# EAGLE board dual_motor_driver_v6 (EAGLE 8.2.2)
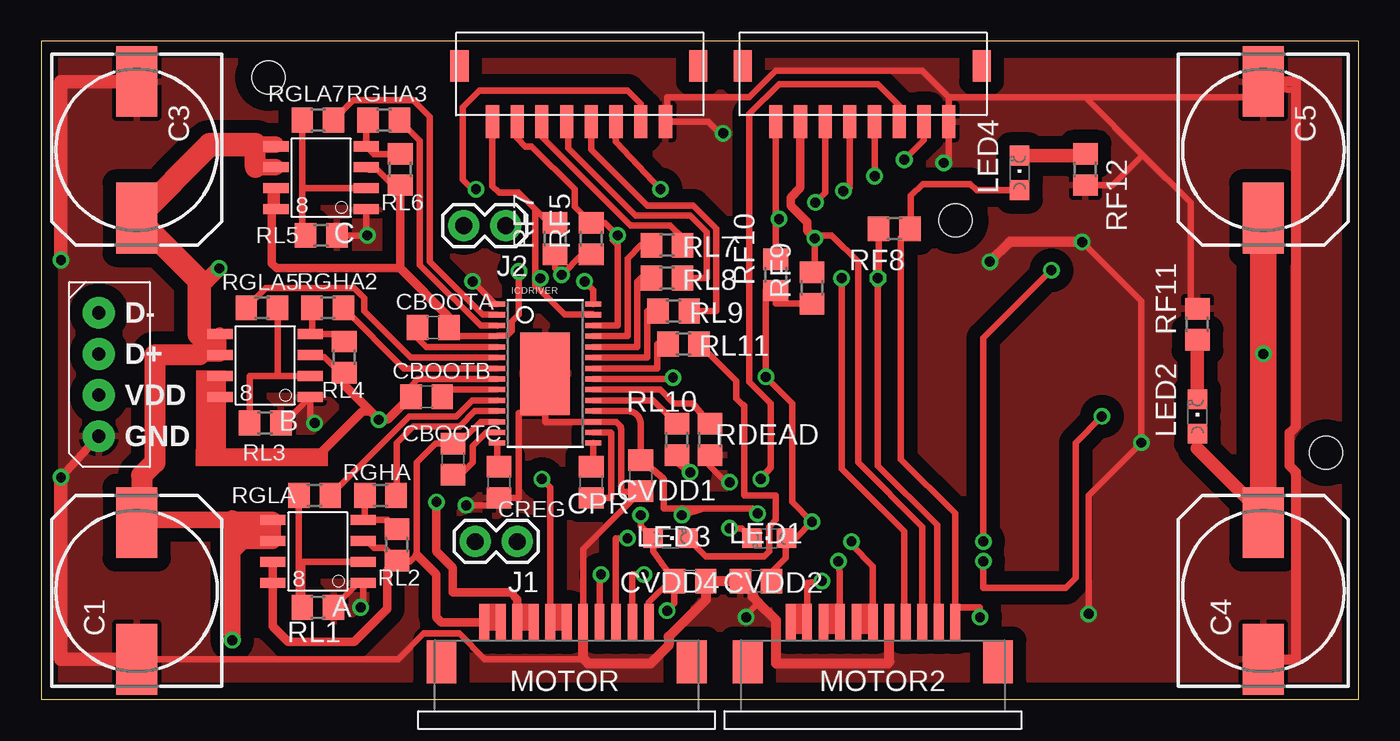
[diagram p0: board, top side]
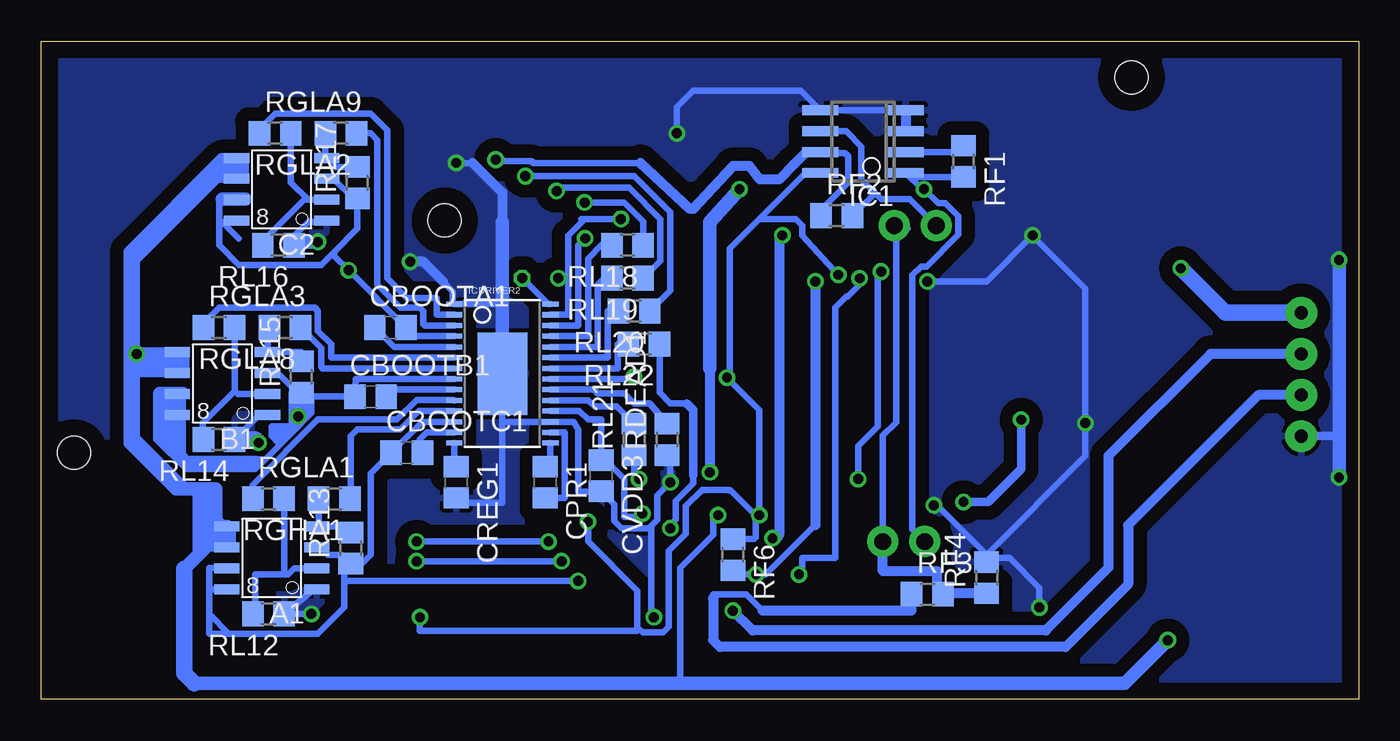
[diagram p1: board, bottom side, seen from below]

Size 80 x 40 mm. Coordinates in mm from the lower left corner, seen from the top.
Outline: 0,0 80,0 80,40 0,40 0,0
Copper layers (1*16): Top 0.035mm / dielectric 1.5mm / Bottom 0.035mm
Design rules "Dedo_v5": minimum track width 10mil, minimum drill 24mil, track to track 0.205mm, track to pad 0.205mm, pad to pad 0.205mm, via to via 0.205mm, smd to smd 8mil, copper to edge 40mil, drill to drill 8mil, minimum pad ring 10mil, minimum via ring 8mil, stop-mask expansion 4mil, vias tented up to drill 0mil, thermal gap 10mil
Net classes: 0 default: clearance 0.205 mm
Holes 2 mm at 13.8,37.8 78,15 55.5,29.1

## Footprints (pad centres in the part's own frame; a part is rotated, then mirrored left to right if it is on the bottom)
SOIC8 = smd 1.524 x 0.61: 1 -2.743,1.905; 2 -2.743,0.635; 3 -2.743,-0.635; 4 -2.743,-1.905; 5 2.743,-1.905; 6 2.743,-0.635; 7 2.743,0.635; 8 2.743,1.905
140CLH-1010 = smd 4.3 x 2.5: + 4.15,0; - -4.15,0
C0805 = smd 1.3 x 1.5: 1 -0.95,0; 2 0.95,0
SO08 = smd 0.6 x 2.2: 1 -1.905,-2.6; 2 -0.635,-2.6; 3 0.635,-2.6; 4 1.905,-2.6; 5 1.905,2.6; 6 0.635,2.6; 7 -0.635,2.6; 8 -1.905,2.6
TSSOP28 = smd 0.305 x 0.991: 1 -4.225,-2.918; 2 -3.575,-2.918; 3 -2.925,-2.918; 4 -2.275,-2.918; 5 -1.625,-2.918; 6 -0.975,-2.918; 7 -0.325,-2.918; 8 0.325,-2.918; 9 0.975,-2.918; 10 1.625,-2.918; 11 2.275,-2.918; 12 2.925,-2.918; 13 3.575,-2.918; 14 4.225,-2.918; 15 4.225,2.918; 16 3.575,2.918; 17 2.925,2.918; 18 2.275,2.918; 19 1.625,2.918; 20 0.975,2.918; 21 0.325,2.918; 22 -0.325,2.918; 23 -0.975,2.918; 24 -1.625,2.918; 25 -2.275,2.918; 26 -2.925,2.918; 27 -3.575,2.918; 28 -4.225,2.918 | smd 5 x 3: PAD 0,0
1X02 = drill 1.016 pad 1.88: 1 0,0; 2 2.54,0
CHIPLED_0805 = smd 1.2 x 1.2: A 0,-1.05; C 0,1.05
68611114122 = smd 0.6 x 2.2: 1 -8.5,1.1; 2 -7.5,1.1; 3 -6.5,1.1; 4 -5.5,1.1; 5 -4.5,1.1; 6 -3.5,1.1; 7 -2.5,1.1; 8 -1.5,1.1; 9 -0.5,1.1; 10 0.5,1.1; 11 1.5,1.1 | smd 1.8 x 2.6: Z1 -11.1,-1.3; Z2 4.1,-1.3
R0805 = smd 1.3 x 1.5: 1 -0.95,0; 2 0.95,0
JST = smd 0.8 x 2: 1 -4.8,-2.7; 2 -3.3,-2.7; 3 -1.8,-2.7; 4 -0.3,-2.7; 5 1.2,-2.7; 6 2.7,-2.7; 7 4.2,-2.7; 8 5.7,-2.7 | smd 1.1 x 1.9: 9 -6.8,0.7; 10 7.7,0.7
DYNAMIXEL_SPOX_04 = drill 0.8 pad 1.93: 1 0,0; 2 2.5,0; 3 5,0; 4 7.5,0

## Placement (x,y rotation side)
A  FDS8949  [SOIC8]  16.8,9 180 top
A1  FDS8949  [SOIC8]  66,8.6 180 bottom
B  FDS8949  [SOIC8]  13.6,20.3 180 top
B1  FDS8949  [SOIC8]  69,19.2 180 bottom
C  FDS8949  [SOIC8]  17,31.7 180 top
C1  470u  [140CLH-1010]  5.8,6.6 90 top
C2  FDS8949  [SOIC8]  65.4,31 180 bottom
C3  470u  [140CLH-1010]  5.8,33.4 270 top
C4  470u  [140CLH-1010]  74.2,6.6 90 top
C5  470u  [140CLH-1010]  74.2,33.4 270 top
CBOOTA  0.033u  [C0805]  23.8,22.6 0 top
CBOOTA1  0.033u  [C0805]  58.8,22.6 0 bottom
CBOOTB  0.033u  [C0805]  23.4,18.4 0 top
CBOOTB1  0.033u  [C0805]  60,18.4 0 bottom
CBOOTC  0.033u  [C0805]  25,14.6 270 top
CBOOTC1  0.033u  [C0805]  57.8,15 0 bottom
CPR  0.47u  [C0805]  33.4,13.2 270 top
CPR1  0.47u  [C0805]  49.4,13.2 270 bottom
CREG  0.68u  [C0805]  27.8,13.2 270 top
CREG1  0.68u  [C0805]  54.8,13.2 270 bottom
CVDD1  0.1U  [C0805]  36.4,13.6 270 top
CVDD2  0.1u  [C0805]  43.4,7.2 180 top
CVDD3  0.1U  [C0805]  46,13.6 270 bottom
CVDD4  0.1u  [C0805]  39.4,7.2 0 top
IC1  MCP602SN  [SO08]  30.1,33.9 90 bottom
ICDRIVER  A9415  [TSSOP28]  30.6,19.8 270 top
ICDRIVER2  A9415  [TSSOP28]  52,19.8 270 bottom
J1  [1X02]  28.9,9.6 180 top
J2  [1X02]  28.2,28.8 180 top
LED1  [CHIPLED_0805]  44.2,9.8 90 top
LED2  [CHIPLED_0805]  70.2,17.2 0 top
LED3  [CHIPLED_0805]  38.2,9.8 270 top
LED4  [CHIPLED_0805]  59.4,32 0 top
MOTOR  68611114122  [68611114122]  35.4,3.6 0 top
MOTOR2  68611114122  [68611114122]  54,3.6 0 top
RDEAD  40.2k  [R0805]  40.6,15.8 90 top
RDEAD1  40.2k  [R0805]  42,15.8 90 bottom
RF1  200k  [R0805]  24,32.7 270 bottom
RF2  200k  [R0805]  31.7,29.4 0 bottom
RF3  10k  [R0805]  26.2,6.4 0 bottom
RF4  1k  [R0805]  22.6,7.4 90 bottom
RF5  12k  [R0805]  33.4,28 90 top
RF6  12k  [R0805]  38,8.8 270 bottom
RF7  12k  [R0805]  31.2,28 90 top
RF8  12k  [R0805]  51.8,28.6 180 top
RF9  12k  [R0805]  46.8,25 90 top
RF10  12k  [R0805]  44.6,25.8 90 top
RF11  10k  [R0805]  70.2,22.8 90 top
RF12  10k  [R0805]  63.4,32.2 270 top
RGHA  47.5  [R0805]  20.6,12.4 180 top
RGHA1  47.5  [R0805]  62.2,12.2 180 bottom
RGHA2  47.5  [R0805]  17.4,23.8 180 top
RGHA3  47.5  [R0805]  20.8,35.2 180 top
RGLA  47.5  [R0805]  16.6,12.4 180 top
RGLA1  47.5  [R0805]  66.2,12.2 0 bottom
RGLA2  47.5  [R0805]  61.8,34.4 180 bottom
RGLA3  47.5  [R0805]  69.2,22.6 0 bottom
RGLA5  47.5  [R0805]  13.4,23.8 0 top
RGLA7  47.5  [R0805]  16.8,35.2 180 top
RGLA8  47.5  [R0805]  65.2,22.6 180 bottom
RGLA9  47.5  [R0805]  65.8,34.4 0 bottom
RL1  470K  [R0805]  16.8,5.6 180 top
RL2  470K  [R0805]  21.6,9.4 90 top
RL3  470K  [R0805]  13.6,16.8 180 top
RL4  470K  [R0805]  18.4,20.8 90 top
RL5  470K  [R0805]  17,28.2 180 top
RL6  470K  [R0805]  21.8,32.2 90 top
RL7  1k  [R0805]  38,27.6 180 top
RL8  1k  [R0805]  38,25.6 180 top
RL9  1k  [R0805]  38.4,23.6 180 top
RL10  1k  [R0805]  38.6,15.8 90 top
RL11  1k  [R0805]  39,21.6 180 top
RL12  470K  [R0805]  66.2,5.2 180 bottom
RL13  470K  [R0805]  61.2,9.2 90 bottom
RL14  470K  [R0805]  69.2,15.8 180 bottom
RL15  470K  [R0805]  64.2,19.6 90 bottom
RL16  470K  [R0805]  65.6,27.6 180 bottom
RL17  470K  [R0805]  60.8,31.4 90 bottom
RL18  1k  [R0805]  44.4,27.6 180 bottom
RL19  1k  [R0805]  44.4,25.6 180 bottom
RL20  1k  [R0805]  44,23.6 180 bottom
RL21  1k  [R0805]  44,15.8 90 bottom
RL22  1k  [R0805]  43.4,21.6 180 bottom
U$1  JST8  [JST]  32.2,37.8 0 top
U$2  JST8  [JST]  49.4,37.8 0 top
U$3  DYNAMIXEL_RS485  [DYNAMIXEL_SPOX_04]  3.5,16 90 top

## Library data of the parts
A A1 B B1 C C2 IC1 ICDRIVER ICDRIVER2 U$1 U$2 = dedo
C1 C3-C5 CBOOTA CBOOTA1 CBOOTB CBOOTB1 CBOOTC CBOOTC1 CPR CPR1 CREG CREG1 CVDD1-CVDD4 RDEAD RDEAD1 RF1-RF12 RGHA RGHA1-RGHA3 RGLA RGLA1-RGLA3 RGLA5 RGLA7-RGLA9 RL1-RL22 = resistor
J1 J2 U$3 = uchile_robotics_eagle_lib
LED1-LED4 = adafruit
MOTOR MOTOR2 = FPC_Connectors_Flat_Flexible_Cable_rev15c

## Nets
+5V: CVDD2.1 CVDD4.1 IC1.8 ICDRIVER2.21 ICDRIVER.21 LED1.A LED3.A LED4.A MOTOR2.11 MOTOR.11 RF5.1 RF6.1 RF7.1 RF8.1 RF9.1 RF10.1 U$3.3
+24V: A1.5 A1.6 A.5 A.6 B1.5 B1.6 B.5 B.6 C1.+ C2.5 C2.6 C3.+ C4.+ C5.+ C.5 C.6 CVDD1.1 CVDD3.1 ICDRIVER2.18 ICDRIVER.18 LED2.A U$3.4
-5V: RF3.1 U$3.2
BRAKEN: RL7.1 U$1.3
BRAKEN2: RL18.1 U$2.3
DIR: RL8.1 U$1.4
DIR2: RL19.1 U$2.4
ENABLE: RL9.1 U$1.5
ENABLE2: RL20.1 U$2.5
GND: A1.1 A.1 B1.1 B.1 C1.- C2.1 C3.- C4.- C5.- C.1 CREG1.2 CREG.2 CVDD1.2 CVDD2.2 CVDD3.2 CVDD4.2 IC1.3 IC1.4 IC1.5 ICDRIVER2.1 ICDRIVER2.17 ICDRIVER2.PAD ICDRIVER.1 ICDRIVER.17 ICDRIVER.PAD MOTOR2.7 MOTOR.7 RDEAD1.1 RDEAD.1 RF4.2 RF11.2 RF12.2 RL1.1 RL3.1 RL5.1 RL12.1 RL14.1 RL16.1 U$1.8 U$2.8 U$3.1
HA: ICDRIVER.26 MOTOR.9 RF5.2 U$1.2
HA2: ICDRIVER2.26 MOTOR2.9 RF9.2 U$2.2
HB: ICDRIVER.27 MOTOR.8 RF7.2 U$1.1
HB2: ICDRIVER2.27 MOTOR2.8 RF10.2 U$2.1
HC: ICDRIVER.28 MOTOR.10 RF6.2
HC2: ICDRIVER2.28 MOTOR2.10 RF8.2
MOTOR2_1: A1.3 A1.7 A1.8 CBOOTC1.1 ICDRIVER2.12 MOTOR2.1 MOTOR2.2 RL13.1
MOTOR2_2: B1.3 B1.7 B1.8 CBOOTB1.1 ICDRIVER2.8 MOTOR2.3 MOTOR2.4 RL15.1
MOTOR2_3: C2.3 C2.7 C2.8 CBOOTA1.2 ICDRIVER2.4 MOTOR2.5 MOTOR2.6 RL17.1
MOTOR_1: A.3 A.7 A.8 CBOOTC.1 ICDRIVER.12 MOTOR.1 MOTOR.2 RL2.1
MOTOR_2: B.3 B.7 B.8 CBOOTB.1 ICDRIVER.8 MOTOR.3 MOTOR.4 RL4.1
MOTOR_3: C.3 C.7 C.8 CBOOTA.2 ICDRIVER.4 MOTOR.5 MOTOR.6 RL6.1
N$1: A1.2 RGLA1.2 RL12.2
N$2: A1.4 RGHA1.2 RL13.2
N$3: B1.2 RGLA3.2 RL14.2
N$4: B1.4 RGLA8.2 RL15.2
N$5: C2.2 RGLA9.2 RL16.2
N$6: C2.4 RGLA2.2 RL17.2
N$7: B.2 RGLA5.2 RL3.2
N$8: B.4 RGHA2.2 RL4.2
N$9: ICDRIVER2.11 RGHA1.1
N$10: ICDRIVER2.10 RGLA1.1
N$11: ICDRIVER2.6 RGLA3.1
N$12: ICDRIVER2.7 RGLA8.1
N$13: CBOOTA1.1 ICDRIVER2.5
N$14: CBOOTB1.2 ICDRIVER2.9
N$15: C.2 RGLA7.2 RL5.2
N$16: CPR.1 ICDRIVER.15
N$17: ICDRIVER.11 RGHA.1
N$18: C.4 RGHA3.2 RL6.2
N$19: CREG1.1 ICDRIVER2.14
N$20: ICDRIVER.10 RGLA.1
N$21: CREG.1 ICDRIVER.14
N$22: CBOOTC.2 ICDRIVER.13
N$23: CBOOTC1.2 ICDRIVER2.13
N$24: ICDRIVER.2 RGLA7.1
N$25: ICDRIVER.6 RGLA5.1
N$26: ICDRIVER.7 RGHA2.1
N$27: ICDRIVER.3 RGHA3.1
N$28: CBOOTB.2 ICDRIVER.9
N$29: CPR.2 ICDRIVER.16
N$30: ICDRIVER2.2 RGLA9.1
N$31: CBOOTA.1 ICDRIVER.5
N$32: A.2 RGLA.2 RL1.2
N$33: A.4 RGHA.2 RL2.2
N$34: ICDRIVER2.3 RGLA2.1
N$35: CPR1.1 ICDRIVER2.15
N$36: CPR1.2 ICDRIVER2.16
N$37: ICDRIVER2.19 RL21.2
N$38: ICDRIVER2.23 RL20.2
N$39: ICDRIVER2.24 RL19.2
N$40: ICDRIVER.19 RL10.2
N$41: ICDRIVER.23 RL9.2
N$42: ICDRIVER.24 RL8.2
N$43: ICDRIVER2.25 RL18.2
N$44: ICDRIVER.25 RL7.2
N$45: ICDRIVER.20 RDEAD.2
N$46: ICDRIVER.22 RL11.2
N$47: LED3.C RL11.1
N$48: LED2.C RF11.1
N$49: ICDRIVER2.20 RDEAD1.2
N$50: ICDRIVER2.22 RL22.2
N$51: LED1.C RL22.1
N$59: LED4.C RF12.1
N$76: IC1.2 RF1.1
N$82: IC1.6 J2.2 RF2.2
SPEED: RL10.1 U$1.6
SPEED2: RL21.1 U$2.6
VOUT1: IC1.1 J1.2 RF1.2 U$1.7
VOUT2: IC1.7 RF2.1 U$2.7
VT: J1.1 J2.1 RF3.2 RF4.1

## Tracks (layer width: path | path; a pad name or v marks a point on that pad's centre or on a via)
+5V  (via drill 0.6)
  Top 0.406: 38.34,7.34 37.15,9 LED3.A 36.4,10.55 v36.4,11.2 | 38.34,7.34 CVDD4.1 38.45,5.85 v38,5.4 | MOTOR.11 36.9,5.9 38.34,7.34 | CVDD2.1 44.35,7.75 45.2,8.6 45.2,9.75 LED1.A 45.8,9.8 v46.8,10.8 45.6,12 45.6,18 v44,19.6 44,24.85 RF10.1 44.6,24.05 RF9.1 | ICDRIVER.21 38.27,19.48 v38.36,19.56 | v31.6,25.8 31.4,26 | v57,5 57,5.6 55.5,5.6 MOTOR2.11 55.5,11.3 52.2,14.6 52.2,28.05 RF8.1 52.8,28.65 52.8,30.6 53.52,31.32 56.42,31.32 56.79,30.95 LED4.A | RF7.1 31.2,26.2 v31.6,25.8 | RF5.1 32.85,27.05 v31.6,25.8
  Bottom 0.406: 43.8,4.4 43.8,4.17 57,4.17 v57,5 | 43.8,4.4 43.8,6.61 46.8,9.61 v46.8,10.8 | 36.6,11.19 36.41,11 36.6,11 v36.4,11.2 36.4,17.6 v38.36,19.56 38.2,19.72 38.2,27.4 36.4,29.2 | 36.6,11.19 38.12,12.71 38.26,12.71 38.27,12.72 39.88,12.72 39.89,12.71 | ICDRIVER2.21 44.12,19.48 v44,19.6 | 43.8,4.4 43.49,4.09 42.22,4.09 41.89,4.42 41.89,9.02 40.85,10.06 40.85,11.75 39.89,12.71 | 39.89,12.71 39.8,12.71 | IC1.8 33.6,32 36.4,29.2 | 36.4,29.2 34.2,29.2 33.8,28.8 33.8,28.2 v31.6,25.8 | 36.6,11.19 36.6,9.85 36.7,9.75 RF6.1
  Bottom 0.61: U$3.3 9,21 15.2,14.8 15.2,8 19,4.2 36.8,4.2 v38,5.4
+24V  (via drill 0.6)
  Top 0.406: 14.26,33.7 C.5 | 13,9.63 A.6 | 14.06,11 A.5 | C1.+ 6.05,11 6.34,11 11.6,11 14.06,11 | C5.+ v74.2,21 74.2,11.67 | 74.2,11.67 C4.+ | 40.2,11.6 37.8,11.6 37.8,13.4 37.35,13.8 CVDD1.1 36.4,16.75 arc90 35.62,17.52 ICDRIVER.18 | 40.2,11.6 v38.9,11.2 | 40.2,11.6 43.2,11.6 v43.5,11.3 | 14.06,11 | 14.06,11 11.6,8.54 | 73.46,11.98 73.89,11.98 74.2,11.67 | LED2.A 70.2,15.25
  Top 0.813: 9.6,22.2 9.6,20.93 B.6 B.5 | 6.1,10.75 C1.+ | 70.2,15.25 73.46,11.98
  Top 1.016: C.6 13,32.34 | 13,33.7 14.26,33.7 | 9.6,25.45 10.05,25.45 v10.8,26.2 | 11.6,9.58 11.6,8.54 v11.6,3.6 | 11.6,10.27 11.6,9.58 | 11.6,10.27 11.6,11 | 14.06,10.4 A.5 6.43,10.9 6.34,11 | 14.06,10.4 A.6 11.66,9.63 11.6,9.58 | 14.06,10.4 11.73,10.4 11.6,10.27
  Top 1.27: 13,32.34 13,33.7 | 6.1,10.75 6.1,13.6 6.9,14.4 6.9,20.93 9.6,20.93
  Top 1.422: 13,33.7 10.25,33.7 C3.+ 9.6,25.45 9.6,22.2
  Bottom 0.406: B1.6 72.8,19.84 72.8,21 | 72.8,21 71.74,21 B1.5 | C2.6 69.2,31.64 | 69.2,31.64 69.2,32.8 68.14,32.8 C2.5 | 72.8,21 v74.2,21 | v74.2,21 74.2,15.96 A1.5 69.8,10.51 69.8,9.2 68.74,9.2 A1.6 | 69.2,31.64 74.2,26.64 v74.2,21 | ICDRIVER2.18 47.33,17.52 46.8,17 46,17 CVDD3.1 45.55,14.35 44.6,13.4 44.6,11.1 43.7,11.1 v43.5,11.3 | 39,1 38.97,1 | 41.2,1 41.2,8 39.2,10 39.2,10.9 v38.9,11.2
  Bottom 0.813: A1.5 71.3,7.95 | 70.7,1 41.2,1 39,1 | 38.97,1 14.2,1 v11.6,3.6
  Bottom 1.016: 71.3,7.95 71.3,1.6 70.7,1 | U$3.4 8.1,23.5 v10.8,26.2
-5V
  Bottom 0.406: 36.2,5.4 37.2,6.4 39.2,6.4 39.2,6.17
  Bottom 0.61: U$3.2 6.1,18.5 14,10.6 14,7 17.8,3.2 38.8,3.2 39.2,3.6 39.2,6.17 | 36.2,5.4 27.15,5.4 RF3.1
BRAKEN
  Top 0.406: RL7.1 38.95,28.05 38.2,28.8 35.8,28.8 30.4,34.2 U$1.3
BRAKEN2  (via drill 0.6)
  Top 0.406: v47,30.2 47.6,30.8 U$2.3
  Bottom 0.406: RL18.1 43.45,29.05 44.6,30.2 v47,30.2
DIR
  Top 0.406: RL8.1 40.4,25.6 40.4,28.4 39.4,29.4 36.1,29.4 32,33.5 32,35 U$1.4
DIR2  (via drill 0.6)
  Top 0.406: 49.1,31.1 v48.7,30.9 49.1,31.3 U$2.4
  Bottom 0.406: RL19.1 42.4,26.65 42.4,29.2 44.3,31.1 48.5,31.1 v48.7,30.9
ENABLE
  Top 0.406: RL9.1 41,23.6 41,28.6 39.6,30 36.8,30 33.4,33.4 U$1.5
ENABLE2  (via drill 0.6)
  Top 0.406: v50.6,31.8 U$2.5
  Bottom 0.406: RL20.1 41.8,24.85 41.8,29.6 44,31.8 v50.6,31.8
GND  (via drill 0.6)
  Top 0.406: 55.1,36.6 U$2.8 55.1,32.9 v54.8,32.6 | 63.38,36.6 55.1,36.6 | 63.38,36.6 73.25,36.6 C5.- 74.2,37.2 76.2,37 | 55.1,36.6 53.5,38.2 44.6,38.2 43,36.6 38,36.6 38,35.1 U$1.8 40.5,35.1 41.2,34.4 v41.4,34.4 | 30.6,17.4 ICDRIVER.PAD | 30.6,17.4 30.6,16.88 ICDRIVER.17 34.92,16.88 35.2,16.6 35.2,16.46 35.21,16.45 35.21,12.6 36.4,12.6 CVDD1.2 32.9,9.15 MOTOR.7 | 30.6,17.4 29,17.4 29,12.25 CREG.2 27.35,11.8 v25.8,11.8 | RDEAD.1 40.6,14.2 41.6,13.2 v41.8,13.2 | v42.8,5 42.8,5.13 43.55,5.88 | 33.2,2.2 32.95,2.45 26.93,2.45 25.37,4.01 23.23,4.01 21.67,2.45 C1.- | RL3.1 14.75,16.8 B.1 16.34,17.06 v16.6,16.8 | 66.89,33.09 69.8,30.18 69.8,24.15 RF11.2 | 66.89,33.09 63.38,36.6 | RF12.2 65.06,31.25 66.89,33.09 | v63.2,27.8 66.8,24.2 v66.8,15.6 63.6,12.4 v63.6,5.2 | RL1.1 19.25,7.09 A.1 19.54,5.74 v19.4,5.6 | ICDRIVER.1 27.57,24.02 v26.2,25.4 | C.1 19.74,28.26 v19.8,28.2 RL5.1
  Top 0.508: v1.2,13.5 U$3.1
  Top 0.61: C4.- 76.2,2.45 76.2,13.8 75.8,14.2 75.8,16.2 76.2,16.6 76.2,37.55 C5.- | MOTOR.7 32.9,2.5 33.2,2.2 37,2.2 38.09,3.29 38.09,3.81 40.35,6.07 CVDD4.2 CVDD2.2 43.19,6.46 43.19,6.24 43.55,5.88 44.6,4.83 44.6,2.2 51.4,2.2 51.5,2.3 MOTOR2.7 | v63.2,27.8 58.8,27.8 v57.6,26.6
  Top 0.813: v1.2,26.7 1.2,37.55 C3.- | v1.2,13.5 1.2,2.45 C1.-
  Bottom 0.152: 25.4,12 25.6,11.8
  Bottom 0.406: 52,16.88 52,11.95 54.5,11.95 CREG1.2 | 52,16.88 ICDRIVER2.PAD | 52,16.88 ICDRIVER2.17 47.67,16.88 47.4,16.4 47.4,12.6 46.25,12.6 CVDD3.2 45.21,11.86 45.21,10.85 44.75,10.39 43.12,10.39 42.96,10.56 | 53.8,32.6 v54.8,32.6 | RDEAD1.1 41.8,14.65 v41.8,13.2 42.59,12.41 42.59,10.92 42.96,10.56 | 42.96,10.56 42.96,5.16 v42.8,5 | v41.4,34.4 41.4,36 40.4,37 33.9,37 IC1.5 IC1.4 | 22.6,8.8 RF4.2 22.35,8.6 21.2,8.6 19.4,6.8 v19.4,5.6 | 22.6,8.8 25.6,11.8 v25.8,11.8 | A1.1 63.45,6.7 RL12.1 v63.6,5.2 | B1.1 66.75,17.3 RL14.1 | C2.1 62.75,29 63.8,29 64.65,28.15 RL16.1 64.45,27.8 | v66.8,15.6 67,15.8 | 55.6,25.4 55,24.8 55,24.11 ICDRIVER2.1 52.14,24.02 52,23.89 | v26.2,25.4 22.6,25.4 19.82,28.18 | 19.82,28.18 v19.8,28.2 | 22.6,8.8 16.6,14.8 v16.6,16.8 16.6,24.96 19.82,28.18
  Bottom 0.508: 1.22,16 U$3.1
  Bottom 0.61: 53.8,32.6 52,30.8 52,29 | IC1.4 IC1.3 | 55.6,25.4 56.8,26.6 v57.6,26.6
  Bottom 0.813: 52,29 52,23.89 ICDRIVER2.PAD | v1.2,26.7 v1.2,13.5 | 64.45,27.8 v63.2,27.8
  Bottom 1.016: 67,15.8 RL14.1
  pour Top (isolate 0.813): 0,0 80,0 80,40 0,40
  pour Bottom (isolate 0.813): 0,0 80,0 80,40 0,40
HA  (via drill 0.6)
  Top 0.406: ICDRIVER.26 35,22.73 35,27.6 34.7,27.9 v35,28.2 34.25,28.95 RF5.2 32.4,29.95 32.4,31 29.8,33.6 29.4,33.6 28.9,34.1 U$1.2 28.8,35 | MOTOR.9 34.9,9.8 v35.6,9.8
  Bottom 0.406: 35.2,10 35.2,9.8 v35.6,9.8
  Bottom 0.61: 35.2,10 35.2,28.2 v35,28.2
HA2  (via drill 0.6)
  Top 0.406: MOTOR2.9 53.5,10.5 49.6,14.4 49.6,26.6 48,28.2 47.15,28.2 v46.98,28.02 46.98,26.13 RF9.2
  Top 0.508: U$2.2 46.1,31.1 45.5,30.5 45.5,30 46.5,29 46.5,28.5 v46.98,28.02 47,28
  Bottom 0.406: ICDRIVER2.26 47.4,22.73 47.4,27.6 v46.98,28.02 46.8,28.2
HB  (via drill 0.6)
  Top 0.406: ICDRIVER.27 33.48,23.41 32.9,23.41 32.89,23.4 31.8,23.4 30.01,25.19 | MOTOR.8 33.9,7.51 v33.99,7.6 | U$1.1 27.4,31.2 27.8,30.8 29,30.8 30.01,29.79 | RF7.2 30.85,28.95 30.01,29.79 | 30.01,25.19 30.01,29.79 | v30.31,25.59 30.01,25.19
  Bottom 0.406: v34,7.6 v33.99,7.6 33.8,7.6 33.8,8.6 31.8,8.6 31.8,23.8 31.11,24.49 31.02,24.49 30.32,25.19 v30.31,25.59
HB2  (via drill 0.6)
  Top 0.406: 44.6,29.4 U$2.1 | 44.6,29.4 v44.8,29.2 | v48.6,25.6 48.6,14 52.4,10.2 52.4,4.8 MOTOR2.8 | RF10.2 44.6,29.4
  Bottom 0.406: ICDRIVER2.27 48,23.38 48,25.6 | 48,25.6 48,28.2 47,29.2 | 47,29.2 v44.8,29.2 | v48.6,25.6 48,25.6 | 47.2,29.2 47,29.2
HC  (via drill 0.6)
  Top 0.406: v33,25.4 33.52,24.88 ICDRIVER.28 | MOTOR.10 35.9,7.6 v36.6,7.6
  Bottom 0.406: 33,10.6 36,7.6 v36.6,7.6 37.75,7.6 RF6.2
  Bottom 0.61: v33,25.4 33,10.6
HC2  (via drill 0.6)
  Top 0.406: MOTOR2.10 54.4,4.8 54.4,10.6 50.8,14.2 v50.8,25.6 50.85,25.65 RF8.2
  Bottom 0.406: ICDRIVER2.28 49.23,24.02 v50.8,25.6
MOTOR2_1  (via drill 0.6)
  Top 0.406: MOTOR2.2 46.5,7.1 v47.4,7.2
  Top 0.508: MOTOR2.1 MOTOR2.2
  Bottom 0.406: RL13.1 61.75,8.8 62.6,8.8 63.03,9.23 A1.3 | A1.8 69.8,6.7 | 69.8,6.7 69.8,8 68.74,8 A1.7 | ICDRIVER2.12 56.88,16.88 CBOOTC1.1 60,13.75 60,8.8 60.55,8.25 RL13.1 | 69.8,6.7 69.8,5.2 | 69.8,5.2 68.6,4 | 68.6,4 63.2,4 61.6,5.6 61.6,7.17 | 61.6,7.17 61.6,7.85 RL13.1 | 69.8,5.2 69.8,4 68.6,4 | v47.4,7.2 61.57,7.2 61.6,7.17
MOTOR2_2  (via drill 0.6)
  Top 0.406: MOTOR2.4 48.5,7.7 v48.4,8.4 | v57.2,8.4 57.2,6.8 62.2,6.8 62.8,7.4 62.8,15.6 v64.4,17.2 64.6,17.4
  Top 0.508: MOTOR2.3 MOTOR2.4
  Bottom 0.406: RL15.1 64.45,18.65 65.6,19.8 66.22,19.8 B1.3 | B1.7 72.8,18.57 72.8,17.2 | 72.8,17.2 71.74,17.2 B1.8 | RL15.1 64.8,18.65 64.8,16.6 | 60.91,18.65 CBOOTB1.1 | ICDRIVER2.8 60.91,19.48 CBOOTB1.1 | 72.8,17.2 72.8,16.4 72.8,16.2 71.2,14.6 66.4,14.6 | 66.4,14.6 64.8,16.2 | 64.8,16.2 64.8,16.6 | RL15.1 63.95,18.4 63.6,18.4 | 63.6,18.4 CBOOTB1.1 | 65.8,16.2 65.4,16.6 | 65.4,16.6 64.8,16.6 | 66.4,14.6 67,14 71.2,14 73,15.8 73,16.4 | 65.4,16.6 66,16.6 66,16 65.6,15.6 65.6,15.8 65,16.4 65.4,16.4 65.8,16 | 64.8,16.2 63.6,17.4 63.6,18.4 | 63.6,18.4 64.6,17.4 64.6,16.6 63.8,17.4 63.8,17.8 v64.4,17.2 64.4,18 | 71.4,14.6 71.4,18.4 71.8,18 71.8,15 72.2,15.4 72.2,17 | v48.4,8.4 v57.2,8.4
  Bottom 0.813: 71.4,18.6 72.8,18.6 72.8,16.4 72.8,16 71.8,15 71.4,14.6 71.2,14.4 67,14.4
MOTOR2_3  (via drill 0.6)
  Top 0.406: MOTOR2.6 50.5,8.1 49.2,9.4 v49.2,9.6 | v57.2,9.6 57.2,21.95 v61.34,26.09
  Top 0.508: MOTOR2.5 MOTOR2.6
  Bottom 0.406: RL17.1 61.05,30.45 62.2,31.6 62.62,31.6 C2.3 | ICDRIVER2.4 57.33,22.07 CBOOTA1.2 v61.34,26.09 62.2,26.95 62.2,27.2 | RL17.1 60.8,29.95 | 69.2,29 69.2,30.36 C2.7 | 69.2,29 69,29 | 69,29 68.14,29 C2.8 | 69.2,29 69.2,27.6 68,26.4 63,26.4 62.2,27.2 | 62.2,27.2 60.8,28.6 RL17.1 | 68,28 69,29 | v49.2,9.6 v57.2,9.6
MOTOR_1
  Top 0.152: A.8 A.7
  Top 0.406: A.3 19.77,9.63 20.2,9.2 20.85,9.2 RL2.1 21.65,8.4 22.4,8.4 22.8,8.8 22.8,14.4 23.95,15.55 CBOOTC.1 25.45,16 25.8,16 26.68,16.88 ICDRIVER.12
  Top 0.508: A.7 14.06,4.44 15,3.5 19,3.5 21,5.5 21,7.85 RL2.1 | MOTOR.2 MOTOR.1 24.3,4.7 24,5 24,7.6 22.8,8.8
MOTOR_2  (via drill 0.6)
  Top 0.406: RL4.1 18.15,19.85 17.2,20.8 16.48,20.8 B.3 | ICDRIVER.8 22.88,19.48 22.4,19 22.4,18.55 CBOOTB.1
  Top 0.508: MOTOR.4 MOTOR.3 28.9,6.1 28.5,6.5 25,6.5 25,8 24,9 v24,12 | CBOOTB.1 21.05,17 v20.5,17 20,17.5 | RL4.1 18.4,19.1 20,17.5 | B.8 B.7 10.5,19.31 10.5,15 17,15 19.5,17.5 20,17.5
  Bottom 0.508: v24,12 22.5,12 20.5,14 v20.5,17
MOTOR_3  (via drill 0.6)
  Top 0.152: 14.26,29.85 C.8
  Top 0.406: CBOOTA.2 24.55,22.07 ICDRIVER.4 27.72,22.11 28.3,22.11 28.59,22.4 28.59,22.98 29,23.39 v29,26 | RL6.1 21.35,31.25 20.4,32.2 19.88,32.2 C.3 | MOTOR.5 30.9,12.9 v30.4,13.4
  Top 0.508: MOTOR.6 MOTOR.5 | 21.8,26.2 RL6.1 | CBOOTA.2 24.75,23.25 21.8,26.2 | 14.26,29.85 C.7 14,30.81 14,26.5 14.3,26.2 21.8,26.2
  Bottom 0.406: v30.4,13.4 30.4,15.4 29.2,16.6 29.2,25.8 v29,26 28.8,26.2
N$1
  Bottom 0.406: A1.2 64.64,7.96 65,7.6 65.25,7.6 | 65.25,7.6 67,7.6 67,5.65 RL12.2 | RGLA1.2 65.25,7.6
N$2
  Bottom 0.406: RGHA1.2 63.15,10.61 A1.4 61.55,10.51 RL13.2
N$3
  Bottom 0.406: RGLA3.2 68.25,18.75 | 68.25,18.75 70.2,16.8 70.2,15.85 RL14.2 | B1.2 68.06,18.57 68.25,18.75
N$4
  Bottom 0.406: RL15.2 64.2,21.11 B1.4 66.26,22.6 RGLA8.2
N$5
  Bottom 0.406: RL16.2 66.55,27.85 64.03,30.36 63.8,30.36 | 63.8,30.36 C2.2 | RGLA9.2 64.85,31.41 63.8,30.36
N$6
  Bottom 0.406: RGLA2.2 62.75,33 C2.4 62.1,32.35 RL17.2
N$7
  Top 0.406: RGLA5.2 14.35,19.66 | 14.35,19.66 B.2 | RL3.2 12.65,19.66 14.35,19.66
N$8
  Top 0.406: RL4.2 18.4,22.2 B.4 16.45,22.2 RGHA2.2
N$9
  Bottom 0.406: ICDRIVER2.11 57.08,17.52 58.2,16.4 60.8,16.4 61.2,16 61.2,12.25 RGHA1.1
N$10
  Bottom 0.406: ICDRIVER2.10 54.94,18.2 57.2,18.2 58.4,17 63.2,17 67.15,13.05 RGLA1.1
N$11
  Bottom 0.406: RGLA3.1 70.15,22.85 69.2,23.8 63.4,23.8 63.2,23.6 63.2,22.4 62.4,21.6 62.4,20.8 62.38,20.77 ICDRIVER2.6
N$12
  Bottom 0.406: RGLA8.1 63,21.35 63,20.2 62.92,20.12 ICDRIVER2.7
N$13
  Bottom 0.406: ICDRIVER2.5 58.58,21.43 CBOOTA1.1
N$14
  Bottom 0.406: ICDRIVER2.9 59.01,18.82 CBOOTB1.2
N$15
  Top 0.406: RGLA7.2 15.85,31 | 15.85,31 15.85,28.4 RL5.2 | C.2 15.91,31.07 15.85,31
N$16
  Top 0.406: CPR.1 33.52,14.15 ICDRIVER.15
N$17
  Top 0.406: ICDRIVER.11 26.32,17.52 25.4,16.6 22.6,16.6 21.6,15.6 21.6,12.45 RGHA.1
N$18
  Top 0.406: RGHA3.2 19.74,35.09 C.4 20.2,33.15 RL6.2
N$19
  Bottom 0.406: CREG1.1 54.92,14.27 ICDRIVER2.14
N$20
  Top 0.406: ICDRIVER.10 26.18,18.18 25.2,17.2 22.35,17.2 RGLA.1
N$21
  Top 0.406: ICDRIVER.14 27.68,14.15 CREG.1
N$22
  Top 0.406: ICDRIVER.13 27.02,16.23 26.2,15.4 26.2,14.4 25.6,13.8 24.85,13.8 CBOOTC.2
N$23
  Bottom 0.406: ICDRIVER2.13 56.58,16.23 57,15.8 57,15.15 CBOOTC1.2
N$24
  Top 0.406: ICDRIVER.2 26.82,23.38 23.6,26.6 23.6,35.4 22.6,36.4 18.95,36.4 RGLA7.1
N$25
  Top 0.406: ICDRIVER.6 22.43,20.77 19.6,23.6 19.6,24.4 19,25 13.65,25 RGLA5.1
N$26
  Top 0.406: ICDRIVER.7 22.02,20.12 RGHA2.1
N$27
  Top 0.406: ICDRIVER.3 26.68,22.73 23,26.4 23,33.95 RGHA3.1
N$28
  Top 0.406: ICDRIVER.9 24.15,18.82 CBOOTB.2
N$29
  Top 0.406: CPR.2 34.6,12.25 34.6,16.2 34.58,16.23 ICDRIVER.16
N$30
  Bottom 0.406: ICDRIVER2.2 55.98,23.38 55.98,24.4 57.8,24.4 59,25.6 59,34.6 60,35.6 65.8,35.6 66.8,34.6 66.8,34.45 RGLA9.1
N$31
  Top 0.406: ICDRIVER.5 23.38,21.43 22.8,22 22.8,22.55 CBOOTA.1
N$32
  Top 0.406: RGLA.2 15.65,5.8 RL1.2 15.85,8.37 A.2
N$33
  Top 0.406: RL2.2 21.05,10.9 A.4 19.65,11.01 RGHA.2
N$34
  Bottom 0.406: ICDRIVER2.3 56.73,22.73 56.8,22.8 56.8,23.6 57,23.8 58.2,23.8 59.6,25.2 59.6,34 60,34.4 RGLA2.1
N$35
  Bottom 0.406: CPR1.1 49.08,14.15 ICDRIVER2.15
N$36
  Bottom 0.406: CPR1.2 48.2,12.25 48.2,16.2 48.23,16.23 ICDRIVER2.16
N$37
  Bottom 0.406: ICDRIVER2.19 46.77,18.18 46.4,17.8 45.05,17.8 RL21.2
N$38
  Bottom 0.406: ICDRIVER2.23 45.6,20.77 45.6,23.6 RL20.2
N$39
  Bottom 0.406: ICDRIVER2.24 46.2,21.43 46.2,25.2 45.8,25.6 RL19.2
N$40
  Top 0.406: ICDRIVER.19 37.17,18.18 RL10.2
N$41
  Top 0.406: ICDRIVER.23 36.8,20.77 36.8,23.6 RL9.2
N$42
  Top 0.406: ICDRIVER.24 36.2,21.43 36.2,25.4 36.4,25.6 RL8.2
N$43
  Bottom 0.406: ICDRIVER2.25 46.8,22.07 46.8,26.8 46,27.6 RL18.2
N$44
  Top 0.406: ICDRIVER.25 35.6,22.07 35.6,26.8 36.4,27.6 RL7.2
N$45
  Top 0.406: ICDRIVER.20 37.58,18.82 38.4,18 39.55,18 RDEAD.2
N$46
  Top 0.406: ICDRIVER.22 37.4,20.12 37.4,21.6 RL11.2
N$47
  Top 0.406: RL11.1 42.2,19.35 42.2,18.3 42.6,17.9 arc-90 42.7,17.8 42.7,12.4 44.6,12.4 44.6,10.9 44.2,10.5 44.2,9 43.9,8.7 40.35,8.7 LED3.C
N$48
  Top 0.813: RF11.1 LED2.C
N$49
  Bottom 0.406: RDEAD1.2 43.05,18 44,18 44.6,18.6 46.2,18.6 46.42,18.82 ICDRIVER2.20
N$50
  Bottom 0.406: ICDRIVER2.22 45,20.12 45,21.6 RL22.2
N$51  (via drill 0.6)
  Top 0.406: v41.8,10.4 42.55,10.4 LED1.C
  Bottom 0.406: RL22.1 42.45,18.65 41.8,18 40.8,18 | 40.4,13.6 40.4,13.14 41.46,12.07 41.46,10.94 42,10.4 v41.8,10.4
  Bottom 0.508: 40.4,13.6 40.4,17.6 40.8,18
N$59
  Top 0.406: 63.3,33.05 RF12.1
  Top 0.813: LED4.C 63.3,33.05
N$66
  Bottom 0.813: 67.6,30.4 69,30.4
N$76
  Bottom 0.406: IC1.2 24.39,33.27 RF1.1
N$78
  Bottom 0.813: 69.4,10.8 69.4,12.8 71.8,12.8 74.6,15.6 74.6,27.2 69,32.8 67.8,32.8 67.8,31.8 69.4,31.8 74.2,27
N$79
  Top 0.406: 10.4,22 10.4,21.4 10.2,21.4 10.2,21.8
N$82
  Bottom 0.406: IC1.6 31.14,34.53 30.2,33.6 30.2,31.6 29.4,30.8 | 29.4,30.8 29,30.4 27.26,30.4 J2.2 | RF2.2 29.4,30.75 29.4,30.8
N$87
  Top 0.813: 74.6,27.4 74.6,12.8 73.8,12.8 73.8,27.2
SPEED  (via drill 0.6)
  Top 0.406: U$1.6 34.9,33.9 v37.6,31 | RL10.1 38.6,14.4 v39.4,13.8
  Bottom 0.61: 39.4,20.1 v39.4,13.8
  Bottom 0.813: v37.6,31 39.4,29 39.4,20.1
SPEED2  (via drill 0.6)
  Top 0.406: U$2.6 52.2,35.2 52.2,36 50.8,37.4 44.8,37.4 43,35.6 43,19.3 44.3,18 44.3,14.1 v43.7,13.4
  Bottom 0.406: v43.7,13.4 44,13.8 RL21.1
VOUT1  (via drill 0.6)
  Top 0.406: U$1.7 36.4,36.2 35.6,37 26.6,37 25.6,36 25.6,31.6 26.4,30.8 v26.4,31
  Bottom 0.406: RF1.2 27.25,31.75 IC1.1 26.5,31 v26.4,31 25.55,30.15 25.1,30.15 24.31,29.36 24.31,28.24 26.24,26.31 26.58,26.31 27.11,25.78 27.11,10.35 J1.2
VOUT2  (via drill 0.6)
  Top 0.406: U$2.7 53.6,34 v52.4,32.8
  Bottom 0.406: 43.6,32.6 50.11,32.6 50.22,32.71 52.31,32.71 v52.4,32.8 | IC1.7 32.63,33.2 31.2,33.2 31,33 31,31.4 32.65,29.75 RF2.1
  Bottom 0.61: IC1.7 33.55,33.27 34.31,32.51 34.31,32.49 35.2,31.6 36.37,31.6 36.98,32.41 37.99,32.41 40.4,29.8 40.6,29.8 43.6,32.6
VT
  Bottom 0.406: J1.1 28.9,16.04 28.09,16.85 28.09,27.91 27.4,28.6 28,28.6 J2.1
  Bottom 0.61: J1.1 28.9,7.8 25.6,7.8 25.6,6.4 RF3.2 25.25,6.45 RF4.1
(copper drawn outside any net)
  shapes: Bottom area x7, Top area x8